# Altium PCB ChildBoard.PcbDoc
Units mm, origin at the board's own origin, x right, y up, seen from the top; angles counter-clockwise.
Board outline 46.99 x 24.13 mm, 2 copper layers (Top Layer, Bottom Layer); 10 components, 25 nets, 84 pads, 24 vias.
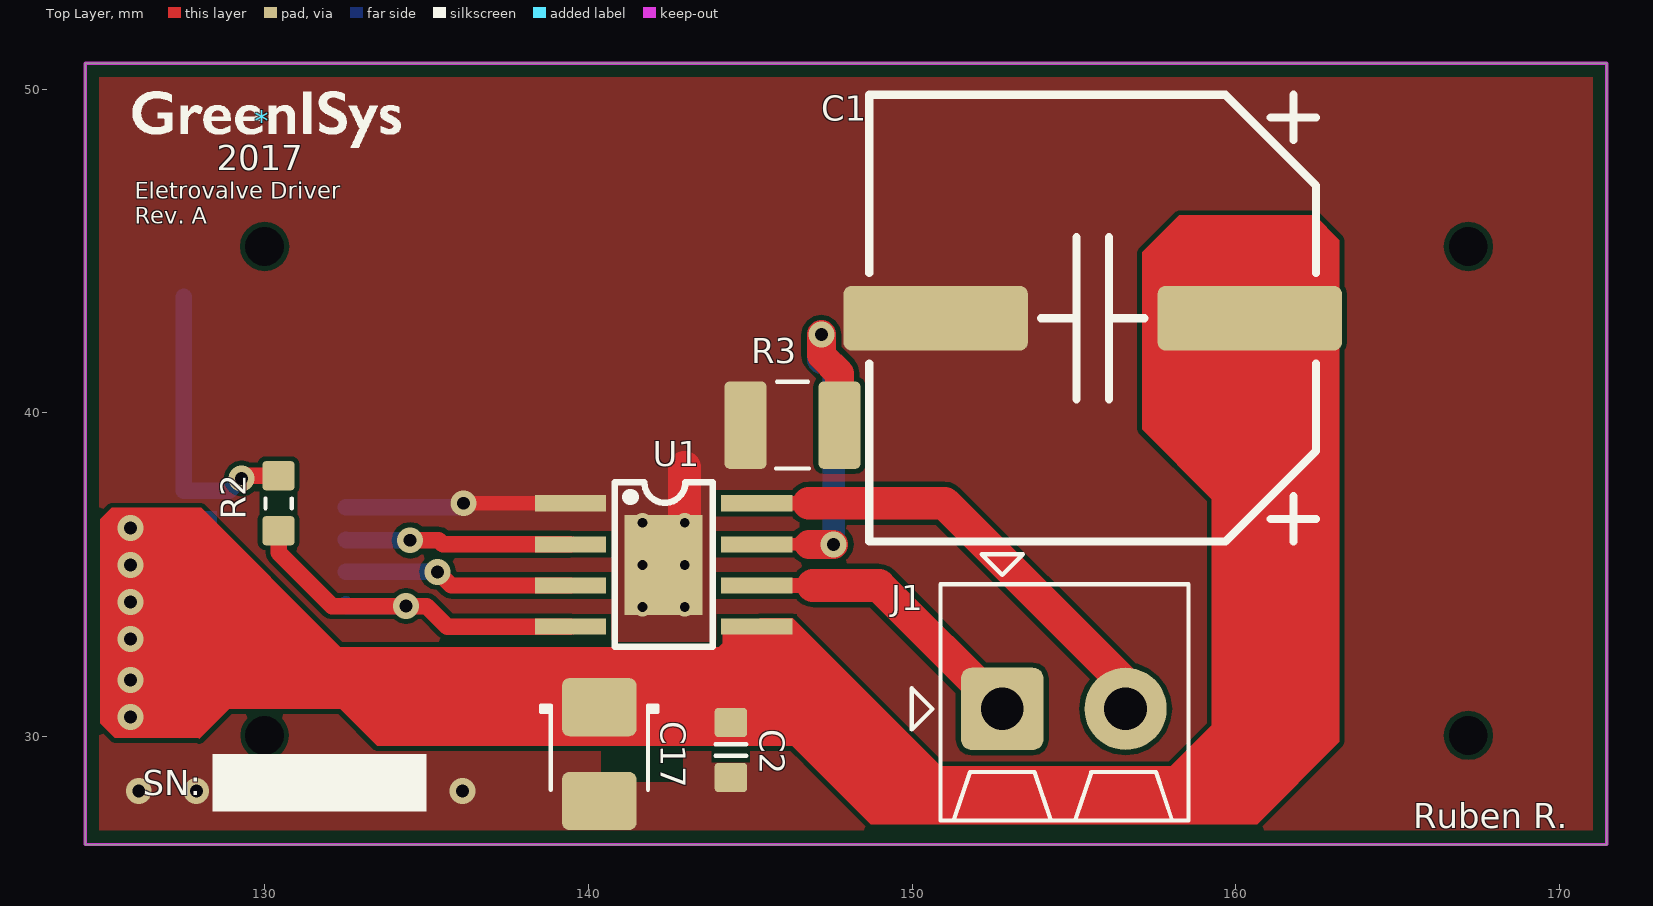
[diagram p0: Top Layer view]
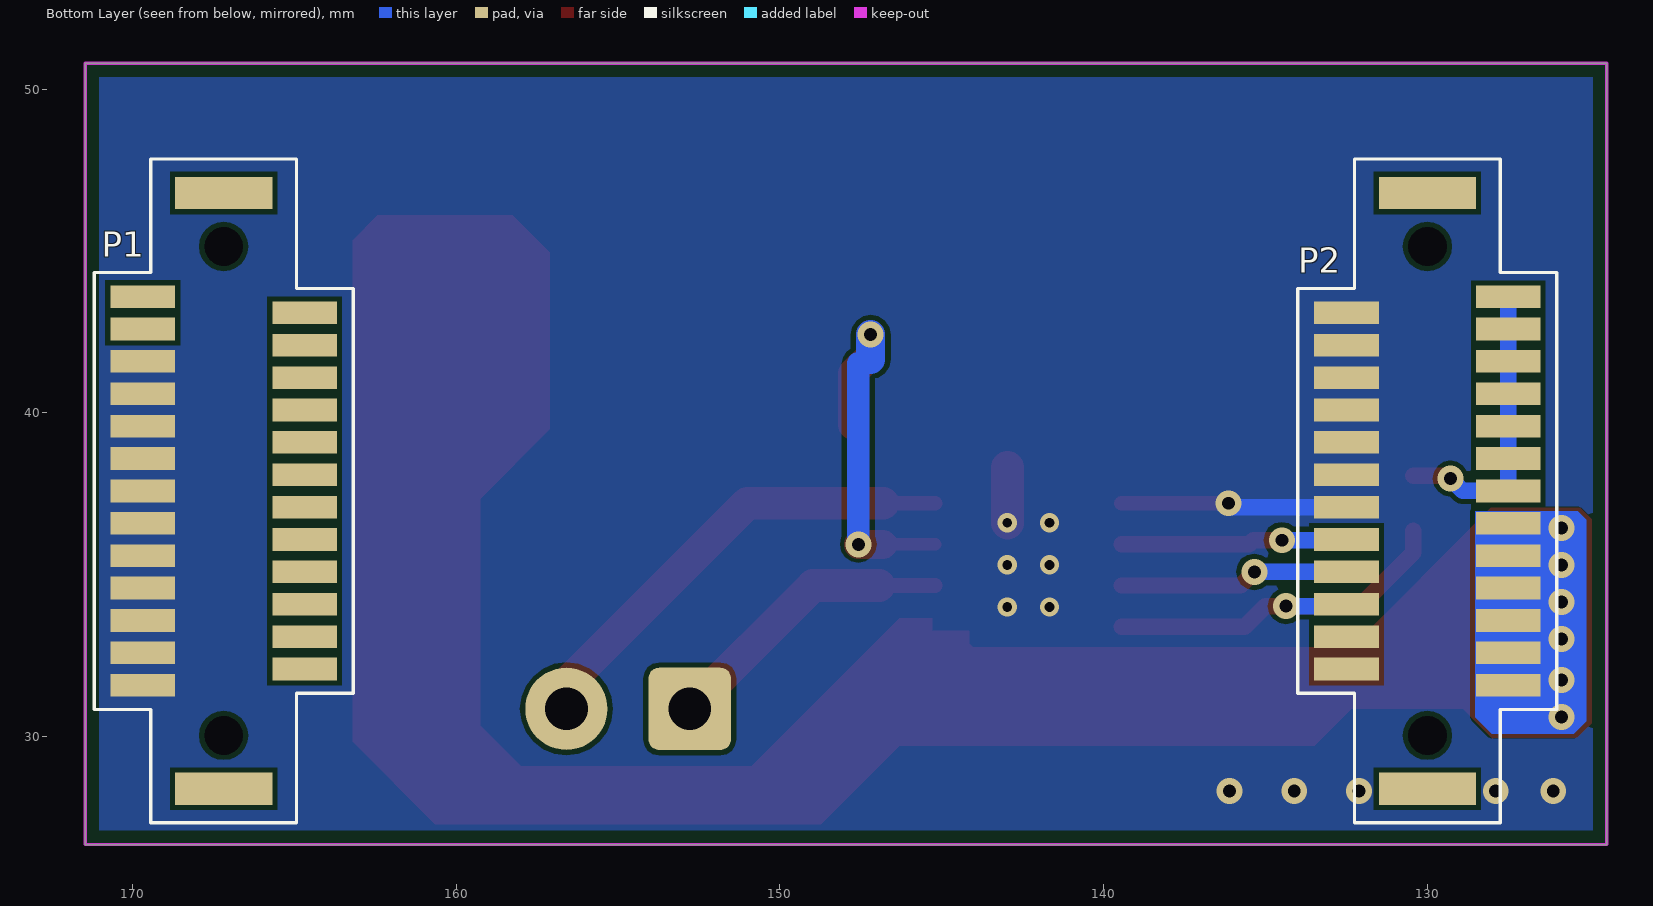
[diagram p1: Bottom Layer view, seen from below]
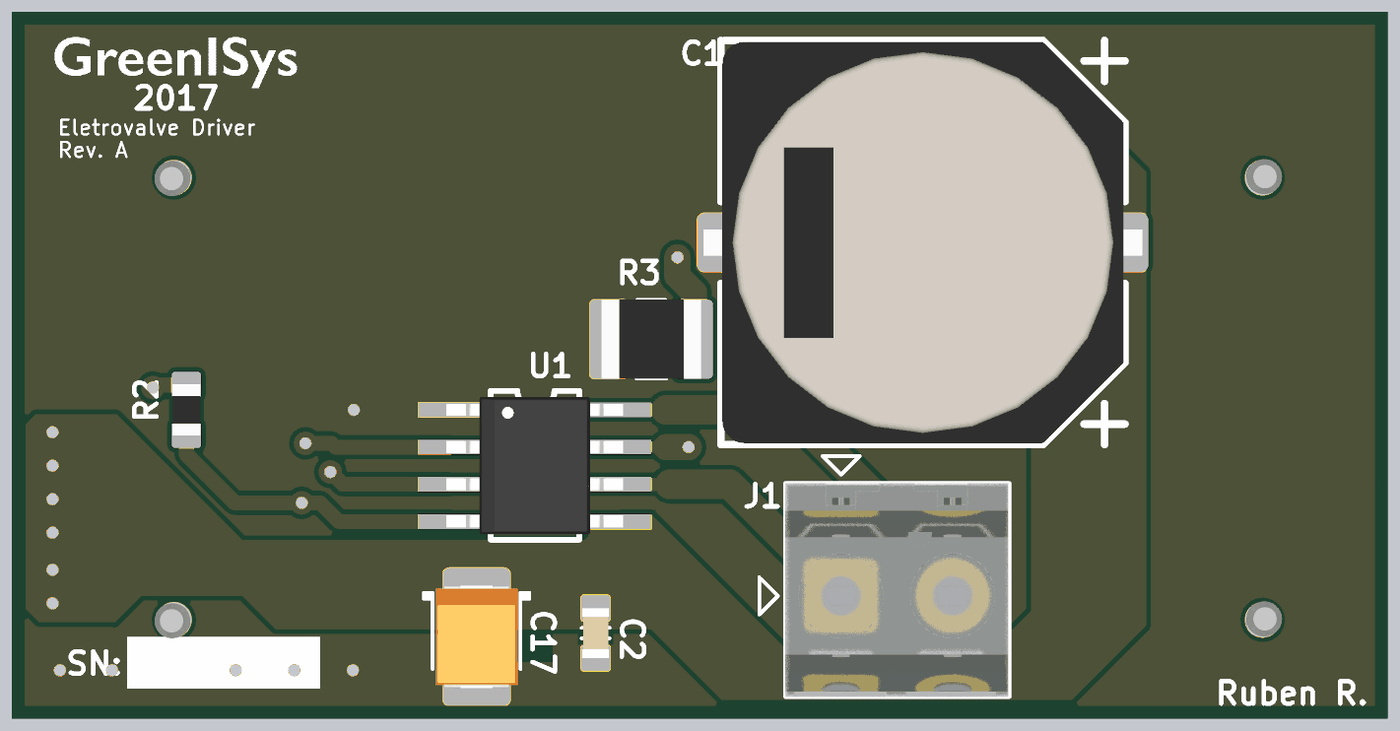
[diagram p2: 3D render of the assembled board from above, using the file's embedded part models]

## Layer stack, top to bottom
Top Solder: solder mask 0.0102, Solder Resist, Dk 3.5
Top Layer: signal copper 0.0356
Dielectric 1: dielectric 0.32, FR-4, Dk 4.8
Bottom Layer: signal copper 0.0356
Bottom Solder: solder mask 0.0102, Solder Resist, Dk 3.5

## Board outline
124.46,26.67 124.46,50.8 171.45,50.8 171.45,26.67

## Design rules (kind name [scope] priority, off if disabled: settings)
Clearance Clearance_BoardEdge [(InPoly And OnLayer('Top Layer')) Or (InPoly And OnLayer('+3.3V')) Or (InPoly And OnLayer('GND'))  Or (InPoly And OnLayer('Bottom Layer')) vs OnLayer('Keep-Out Layer')] p1: gap=0.381
Clearance [All] p2: gap=0.152
HoleSize [All] p1: absolutevalues=TRUE maxlimit=6.35 minlimit=0.33 maxpercent=80.000 minpercent=20.000
MinimumAnnularRing [All] p1: minimumring=0.178
MinimumSolderMaskSliver [All] p1: minsoldermaskwidth=0.01
PlaneConnect [All] p1: planeconnectstyle=Direct reliefexpansion=0.508 reliefentries=4 reliefconductorwidth=0.254 reliefairgap=0.254
PolygonConnect [All] p1: connectstyle=Direct reliefconductorwidth=0.254 reliefentries=4 polygonreliefangle="90 Angle" airgapwidth=0.254
RoutingCorners [All] p1: cornerstyle=45-Degree minsetback=1.27 maxsetback=1.27
RoutingVias [All] p1: holewidth=0.4 width=0.8 viastyle="Through Hole" minholewidth=0.4 minwidth=0.8 maxholewidth=0.4 maxwidth=0.8
SMDNeckDown [All] p1: percent=100.000
SilkToSilkClearance [All] p1: silktosilkclearance=0.102
SilkToSolderMaskClearance SilkscreenOverComponentPads [IsPad] p1: minsilkscreentomaskgap=0.076 clearancetoexposedcopper=TRUE
SolderMaskExpansion [All] p1: expansion=0.025
UnpouredPolygon [All] p1: allowunpoured=FALSE
Width [All] p1: maxlimit=2.54 minlimit=0.152 preferedwidth=0.203
23 further rules are at their usual default settings.

## Components (designator, comment, footprint, x,y, rotation, side; value= is the part's Value field where it differs from the comment)
* "GreenIsysLogo" GreenIsys 129.921,49.022 r0 top
C1 "47µ" CAP_ELEC_SIZE_H13 155.575,42.926 r90 top
C2 "approved sub OK" CAPC1608N 144.399,29.591 r270 top
C17 "dnp" CAPMP3528X210N 140.335,29.464 r270 top
J1 "Stackable ScrewTerm" 2P_PCB_SCREWTERM_90S_3.81MM 152.781,30.861 r270 top
P1 "Header 25 Male" "DF9-25S-1V (MALE)" 167.175,37.592 r270 bottom
P2 "Header 25 Male" "DF9-25S-1V (MALE)" 130,37.592 r90 bottom
R2 "Thick Film" RESC1608N 130.429,37.211 r270 top
R3 "Thick Film" RESC3225N 146.304,39.624 r0 top
U1 "DRV8872-Q1" HSOP-8-DDA 139.446,37.211 r270 top

## Footprints (in the part's own frame and the unit in brackets; to place one, negate y for a bottom-side part, rotate by r counter-clockwise, add the part's x,y. Pads: shape width x height; smd on the part's side, far side on the other; paste and mask are expansions set on the pad)
2P_PCB_SCREWTERM_90S_3.81MM [mil] "TERM BLOCK 2POS SIDE ENT STACKABLE 3.81MM"
  rrect25% 100x100 hole 52: 1(0,0)
  round 100 hole 52: 2(0,150)
  silkscreen extent -188,-110 136,226, body extent -152,-75 136,225, height 335
CAP_ELEC_SIZE_H13 [mm] "Capacitor, polarized, aluminum can; 12.5x13.5mm DxH"
  round 0.508 on Mech14: 0(0,0)
  rrect25% 2x5.7 smd: 1(0,-4.85) 2(0,4.85)
  silkscreen extent -6.9,-6.9 6.9,6.9, body extent -6.85,-7.5 6.85,7.5, height 14
CAPC1608N [mm] "Chip Capacitor, Body 1.6x0.8mm, 0603, IPC Medium Density"
  round 0.254 on Mech14: 0(0,0)
  rrect25% 0.9x1 smd: 1(-0.85,0) 2(0.85,0)
  Top Layer pour cut-out: -0.4,0.6 0.4,0.6 0.4,-0.6 -0.4,-0.6
  silkscreen extent -0.18,-0.48 0.18,0.48, body extent -0.85,-0.45 0.85,0.45, height 0.89
CAPMP3528X210N [mm] "Molded body capacitor, Body 3.5x2.8mm, 1210, IPC Nominal settings"
  round 0.254 on Mech14: 0(0,0)
  rrect25% 1.8x2.3 smd: 1(-1.45,0) 2(1.45,0)
  Top Layer pour cut-out: -0.154,2.593 0.862,2.593 0.862,0.053 -0.154,0.053
  silkscreen extent -1.5,-1.8 1.1,1.8, body extent -1.75,-1.4 1.75,1.4, height 2.1
"DF9-25S-1V (MALE)" [mm]
  rect 1x3 smd: 0(-9.2,0) 0(9.2,0)
  round 0 hole 1.2 paste+0 mask+0: 0(-7.55,0) 0(7.55,0)
  rect 0.7x2 smd: 1(-6,-2.5) 2(-5,-2.5) 3(-4,-2.5) 4(-3,-2.5) 5(-2,-2.5) 6(-1,-2.5) 7(0,-2.5) 8(1,-2.5) 9(2,-2.5) 10(3,-2.5) 11(4,-2.5) 12(5,-2.5) 13(6,-2.5) 14(5.5,2.5) 15(4.5,2.5) 16(3.5,2.5) 17(2.5,2.5) 18(1.5,2.5) 19(0.5,2.5) 20(-0.5,2.5) 21(-1.5,2.5) 22(-2.5,2.5) 23(-3.5,2.5) 24(-4.5,2.5) 25(-5.5,2.5)
  silkscreen extent -10.25,-4 10.25,4, body extent -9.08,-2.88 9.02,2.88, height 3.33
GreenIsys [mm]
  silkscreen extent -3.99,-0.81 4.28,0.91
HSOP-8-DDA [mm]
  rect 0.5x2.2 smd: 1(0,0) 2(1.27,0) 3(2.54,0) 4(3.81,0) 5(3.81,5.75) 6(2.54,5.75) 7(1.27,5.75) 8(0,5.75)
  rect 3.1x2.4 smd: 9(1.905,2.875)
  silkscreen extent -0.65,1.37 4.43,4.39, body extent -0.44,-0.14 4.25,5.89, height 1.7
RESC1608N [mm] "Chip Resistor, Body 1.6x0.8mm, 0603, IPC Medium Density"
  round 0.254 on Mech14: 0(0,0)
  rrect25% 0.9x1 smd: 1(-0.85,0) 2(0.85,0)
  Top Layer pour cut-out: -0.4,0.6 0.4,0.6 0.4,-0.6 -0.4,-0.6
  silkscreen extent -0.15,-0.41 0.15,0.41, body extent -0.87,-0.47 0.88,0.48, height 0.54
RESC3225N [mm] "Chip Resistor, Body 3.2x2.5mm, 1210, IPC Medium Density"
  round 0.508 on Mech14: 0(0,0)
  rrect25% 1.3x2.7 smd: 1(-1.45,0) 2(1.45,0)
  silkscreen extent -0.51,-1.34 0.51,1.34, body extent -1.7,-1.35 1.7,1.35, height 0.69

## Part data
C1: library part CAPE_47u_100V_SMD, "Capacitor SMD Electrolytic 47uF 20% 100V Radial"
C2: library part CAPC_10n_0603_50V_10%, "Capacitor SMD Cer 100nF 10% 10V X7R 0603"
C17: library part CAPT_47u_3528_6V3, "Capacitor SMD Tantalum 47uF 10% 6.3V EIA 3528-21"
J1: library part 2P_ScrewTerm_90S_3.81MM, "Terminal Block Screw Type THT 2-Position 3.81mm pitch"
P1 P2: "Header, 25-Pin"
R2: library part RES_10K_0603_1%, "Resistor SMD chip 10k Ohm 0.1W 1% 0603"
R3: library part RES_2R2_1210_5%, "Resistor SMD chip 0.33 Ohm 0.5W 1% 1210"

## Via types
v1: diameter 0.8, hole 0.4, Top Layer to Bottom Layer, tented both sides, 18 vias
v2: diameter 0.6, hole 0.3, Top Layer to Bottom Layer, 6 vias

## Nets (pads, with @x,y where several pads share a name; then routed paths per layer and width w, separated by ;. In a path a pad name is that pad's centre, name@x,y a point inside that pad or via, vN(x,y) a via of type N, cw(c..) or ccw(c..) an arc to the next point about the centre after c; other vN are vias at no path point)
+3.3V: P2.7 P2.8 P2.9 P2.10 P2.11 P2.12 P2.13 R2.1 | length 9.1
  Top Layer w0.508: v1(129.286,37.973) 129.374,38.061 R2.1
  Bottom Layer w0.508: P2.13 P2.7 128.905,37.592 v1(129.286,37.973)
+9V: C1.1 C2.1 C17.1 P2.1 P2.2 P2.3 P2.4 P2.5 P2.6 U1.5
  other v1: 125.857,30.607 125.857,31.75 125.857,33.02 125.857,34.163 125.857,35.306 125.857,36.449
ADC_IN5: P2.24
ADC_IN7: P2.25
ADC_IN8: P1.19
ADC_IN9: P1.20
GND: C1.2 C2.2 C17.2 P1.3 P1.4 P1.5 P1.6 P1.7 P1.8 P1.9 P1.10 P1.11 P1.12 P1.13 P2.14 P2.15 P2.16 P2.17 P2.18 P2.19 P2.20 R3.1 U1.1 U1.9 | length 8.7
  Top Layer w0.457: v1(136.144,37.211) U1.1
  Top Layer w1.016: v2(142.971,36.606) 142.971,38.323
  Bottom Layer w0.508: P2.20 136.025,37.092 v1(136.144,37.211)
  other v1: 126.111,28.321 127.889,28.321 132.111,28.321 134.111,28.321 136.111,28.321
  other v2: 141.671,34.006 142.971,34.006 141.671,35.306 142.971,35.306 141.671,36.606
GPIO1: P2.21 U1.2 | length 7
  Top Layer w0.508: v1(134.493,36.068) 135.382,36.068 135.509,35.941 U1.2
  Bottom Layer w0.508: P2.21 132.524,36.068 v1(134.493,36.068)
GPIO2: P2.22 U1.3 | length 7.1
  Top Layer w0.508: v1(135.342,35.092) 135.763,34.671 U1.3
  Bottom Layer w0.508: P2.22 v1(135.342,35.092)
GPIO3: P2.23 R2.2 U1.4 | length 12.5
  Top Layer w0.508: R2.2 130.429,35.687 132.08,34.036 v1(134.366,34.036) 135.001,34.036 135.636,33.401 U1.4
  Bottom Layer w0.508: P2.23 132.556,34.036 v1(134.366,34.036)
I2C1_SCL: P1.1
I2C1_SDA: P1.2
NetR3_2: R3.2 U1.7 | length 11.8
  Top Layer w0.381: U1.7 146.685,35.941
  Top Layer w0.7: 146.685,35.941 146.812,35.941
  Top Layer w0.9: 146.812,35.941 v1(147.574,35.941) ; v1(147.193,42.418) 147.193,41.783 147.754,41.222 R3.2
  Bottom Layer w0.7: v1(147.574,35.941) 147.574,41.529
  Bottom Layer w0.9: 147.193,41.656 v1(147.193,42.418)
OUT1: J1.2 U1.8 | length 14.5
  Top Layer w0.457: U1.8 146.812,37.211
  Top Layer w1.016: 146.812,37.211 151.003,37.211 156.591,31.623 J1.2
OUT2: J1.1 U1.6 | length 9.2
  Top Layer w0.457: U1.6 146.939,34.671
  Top Layer w1.016: 146.939,34.671 148.971,34.671 J1.1
SPI1_MISO: P1.24
SPI1_MOSI: P1.25
SPI1_SCK: P1.23
SPI2_MISO/I2C2_SDA: P1.15
SPI2_MOSI: P1.16
SPI2_SCK/I2C2_SCL: P1.14
UART1_RX: P1.18
UART1_TX: P1.17
UART2_RX: P1.22
UART2_TX/SWCLK: P1.21
pads on no net: C1.0 C2.0 C17.0 P1.0 P2.0 R2.0 R3.0

## Polygon pours and split planes (outlines as drawn)
GND on Top Layer "Top plane" (solid, pour order 4): 124.46,50.8 171.45,50.8 171.45,26.67 124.46,26.67
GND on Bottom Layer "Bottom plane" (solid, remove dead copper, pour order 3): 124.46,50.8 171.45,50.8 171.45,26.67 124.46,26.67

## Keep-outs
Keep-Out Layer:
  the board outline again, w0.1

## Other copper
Top Layer:
  region net +9V: 125.273,37.066 124.93,36.723 124.93,30.412 125.376,29.966 127.952,29.966 127.983,29.934 128.91,30.861 132.334,30.861 133.477,29.718 146.939,29.718 146.939,32.512 146.177,33.274 144.145,33.274 144.145,32.893 144.018,32.766 132.334,32.766 128.034,37.066
  region net +9V: 148.59,31.369 150.876,29.083 157.988,29.083 159.258,30.353 159.258,37.338 157.099,39.497 157.099,44.958 158.242,46.101 162.433,46.101 163.195,45.339 163.195,29.845 160.655,27.305 148.717,27.305 146.685,29.337
  region net +9V: 148.59,31.369 146.304,33.655 145.288,33.655 145.288,33.147 146.05,32.385 146.05,29.972 146.812,29.21
Bottom Layer:
  region net +9V: 128.524,36.957 128.524,30.607 128.016,30.099 125.476,30.099 125.095,30.48 125.095,36.703 125.349,36.957

## Silkscreen, mask and mechanical layers (free items; w line width, h text height)
Top Overlay:
  rectangle: 128.397,27.686 135.001,29.464
  text "2017" at 128.524,47.498 h0.76
  text "Eletrovalve Driver" at 125.984,46.609 h0.51
  text "Rev. A" at 125.984,45.847 h0.51
  text "SN:" at 126.238,28.194 h0.76
  text "Ruben R." at 165.481,27.178 h0.76

## Dimensions
124.46,50.8 to 171.45,50.8 on Mechanical 13
124.46,26.67 to 124.46,50.8 on Mechanical 13